# Altium PCB projector_board.PcbDoc
Units mil, origin at the board's own origin, x right, y up, seen from the top; angles counter-clockwise.
Board outline 2125 x 2250 mil, 2 copper layers (Top Layer, Bottom Layer); 47 components, 33 nets, 148 pads, 36 vias.
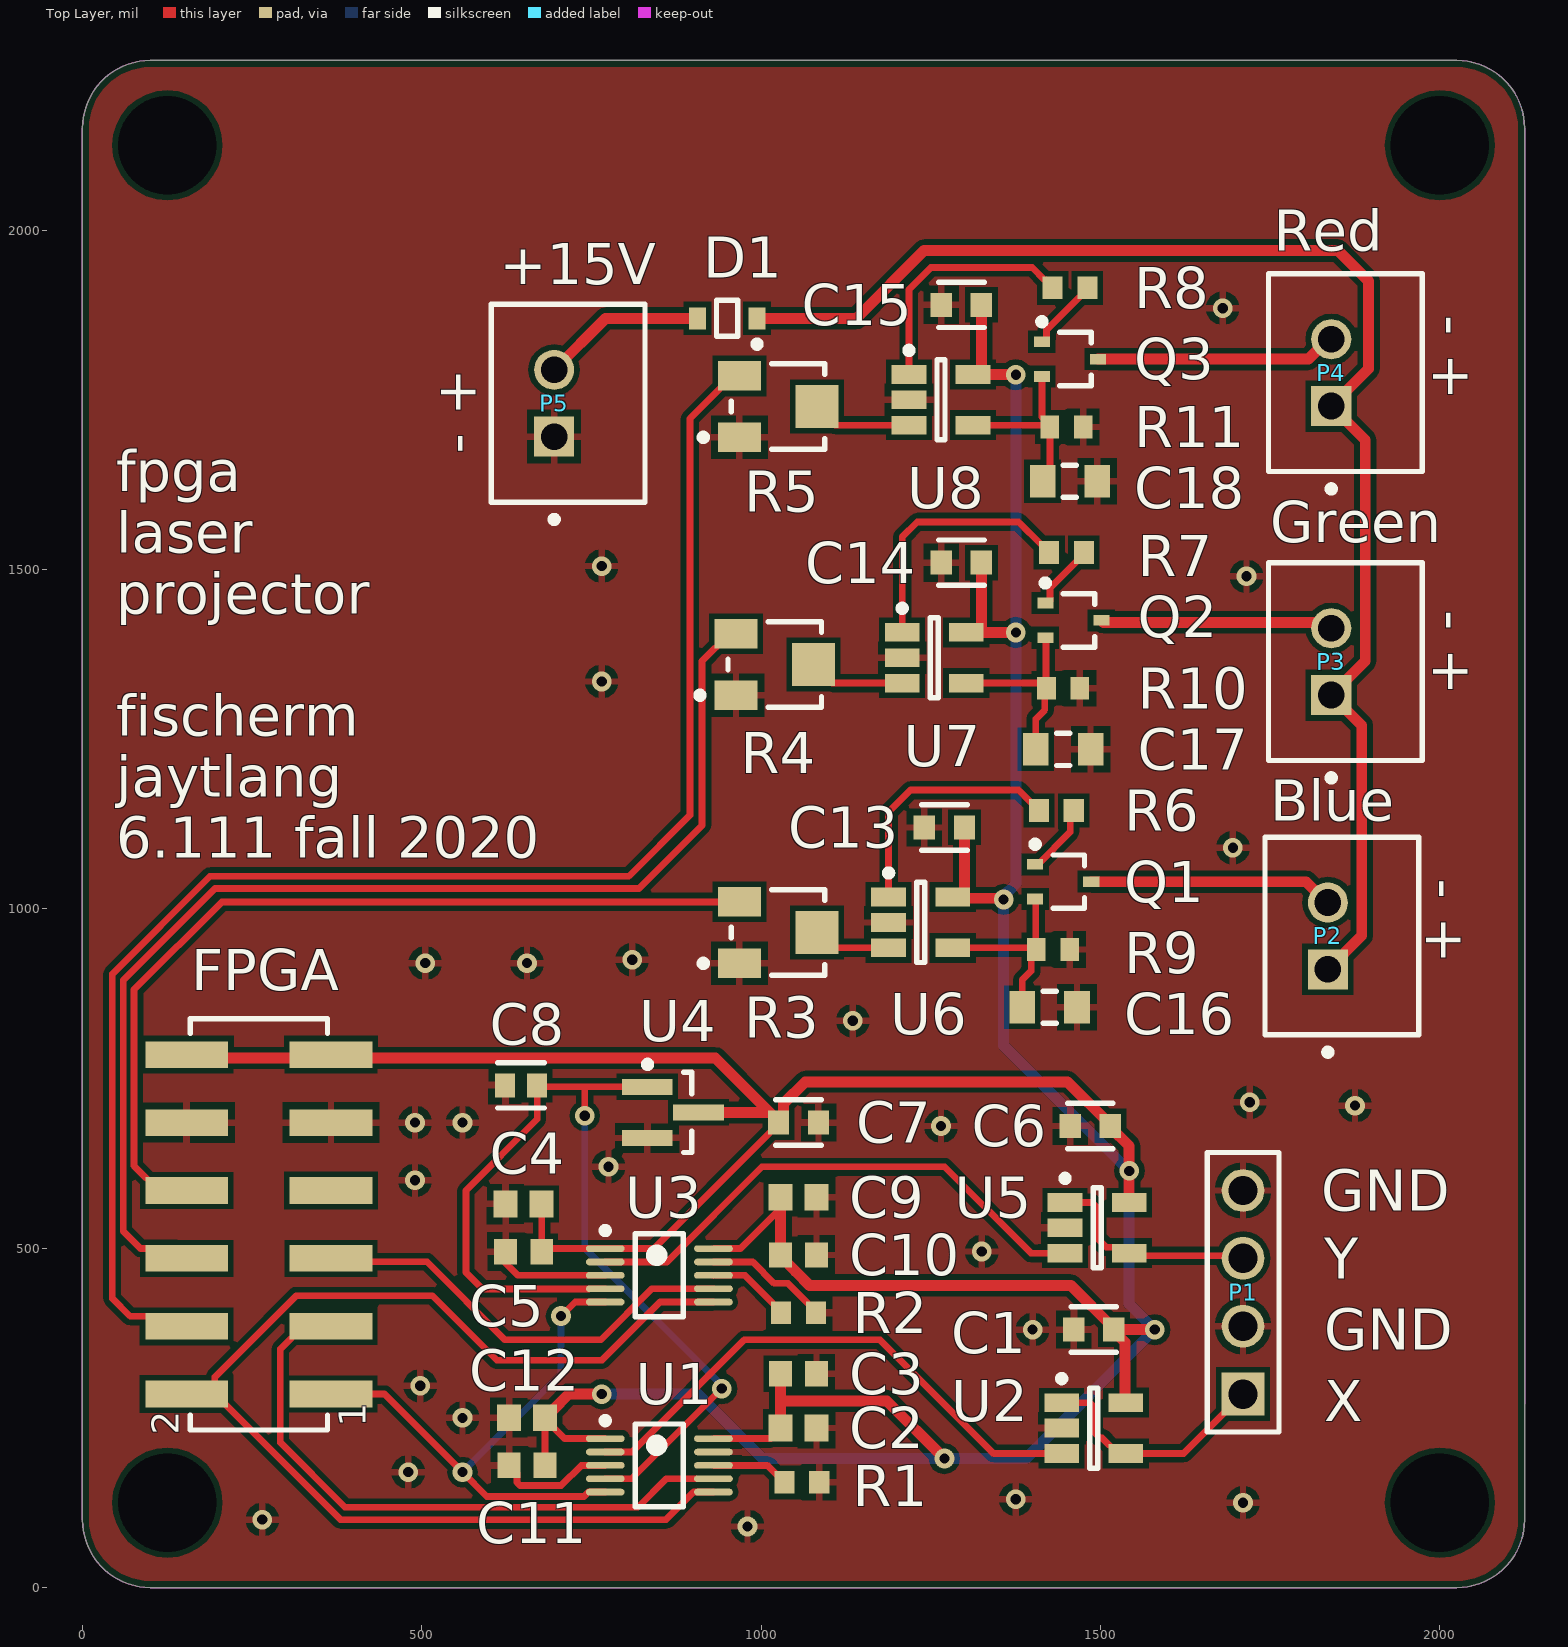
[diagram p0: Top Layer view]
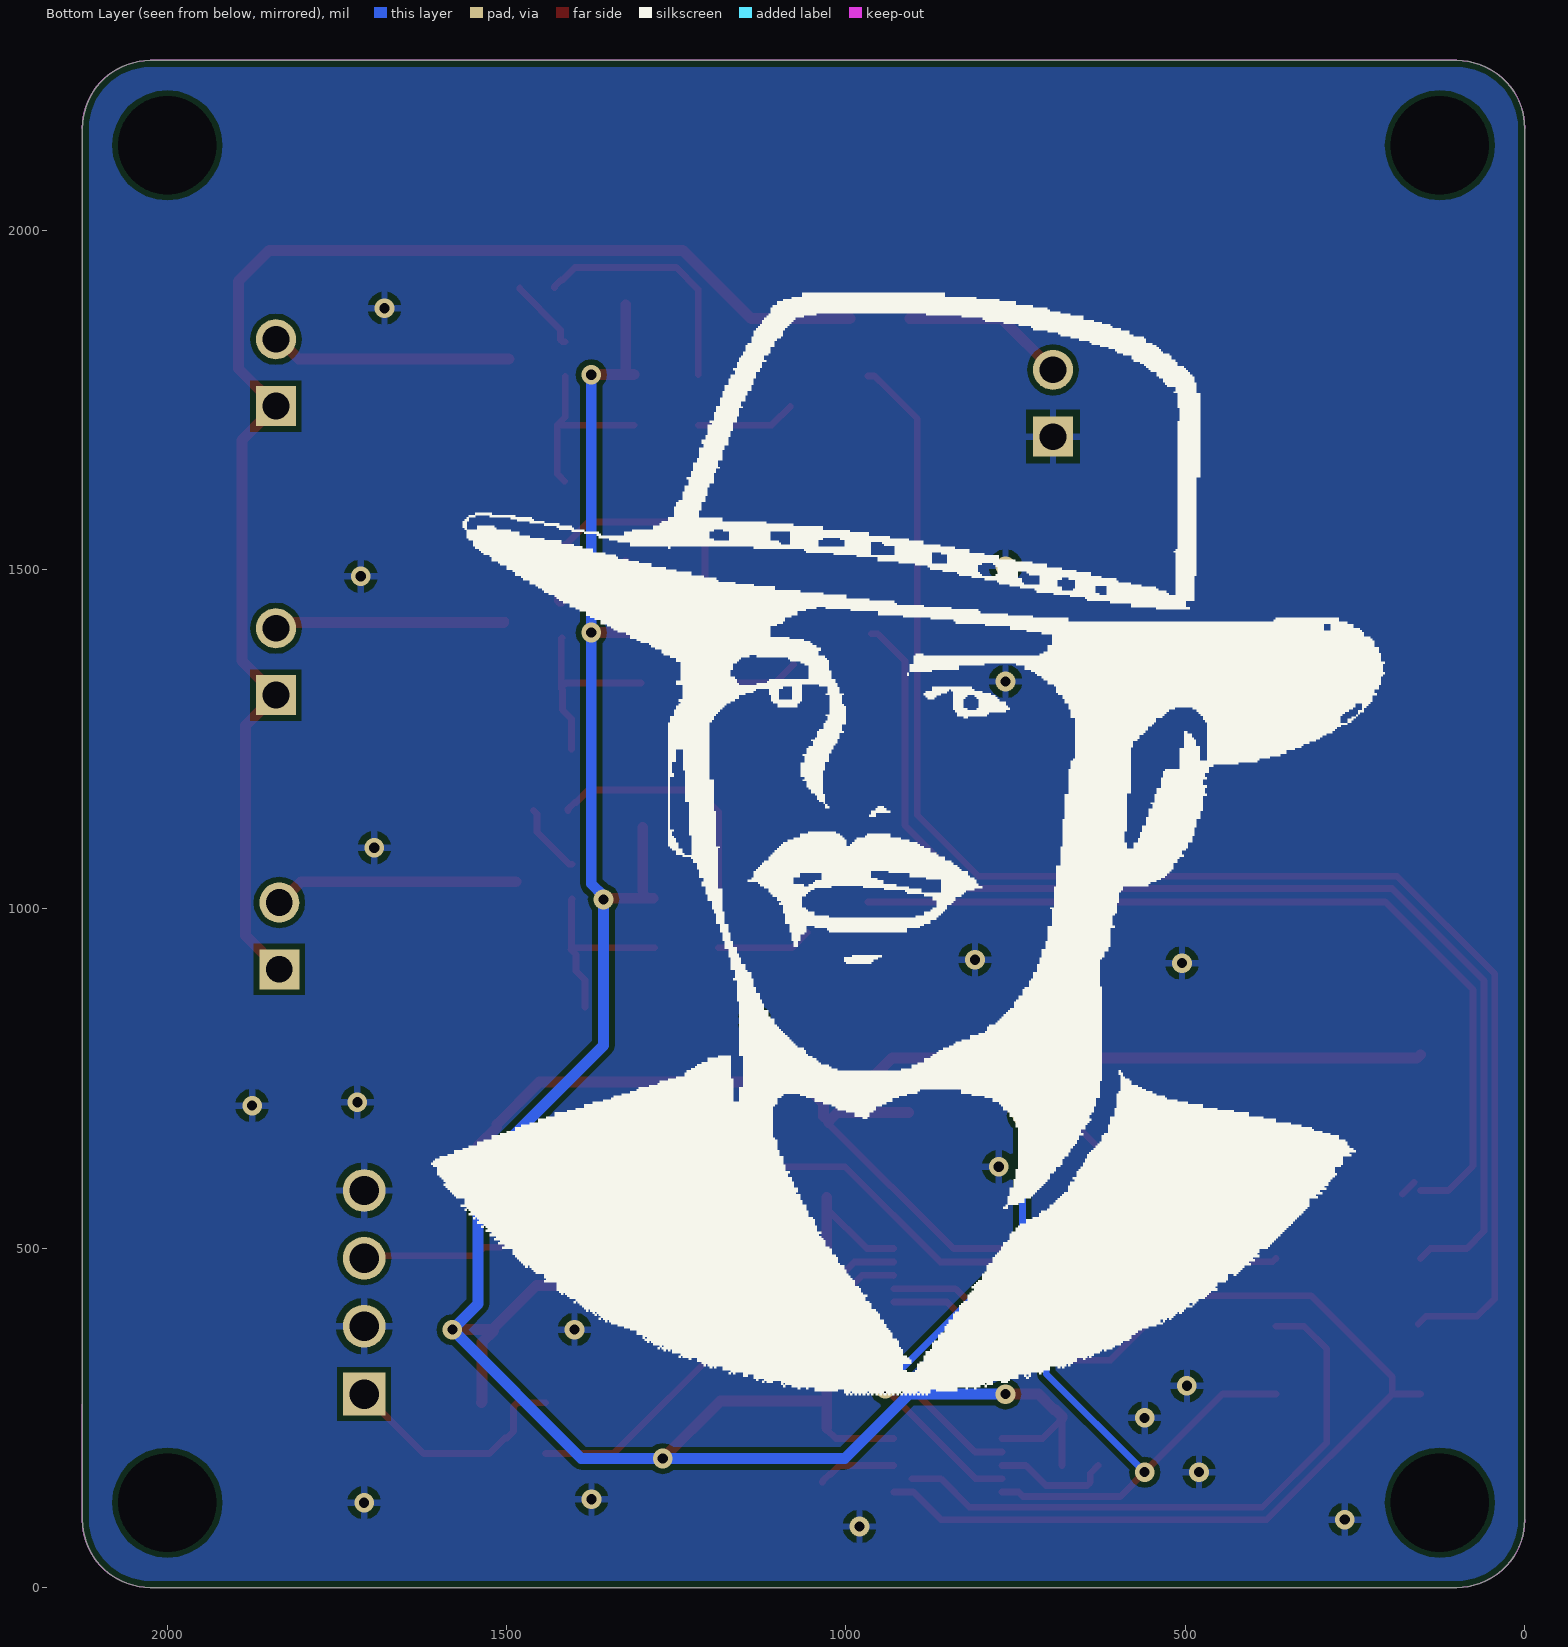
[diagram p1: Bottom Layer view, seen from below]
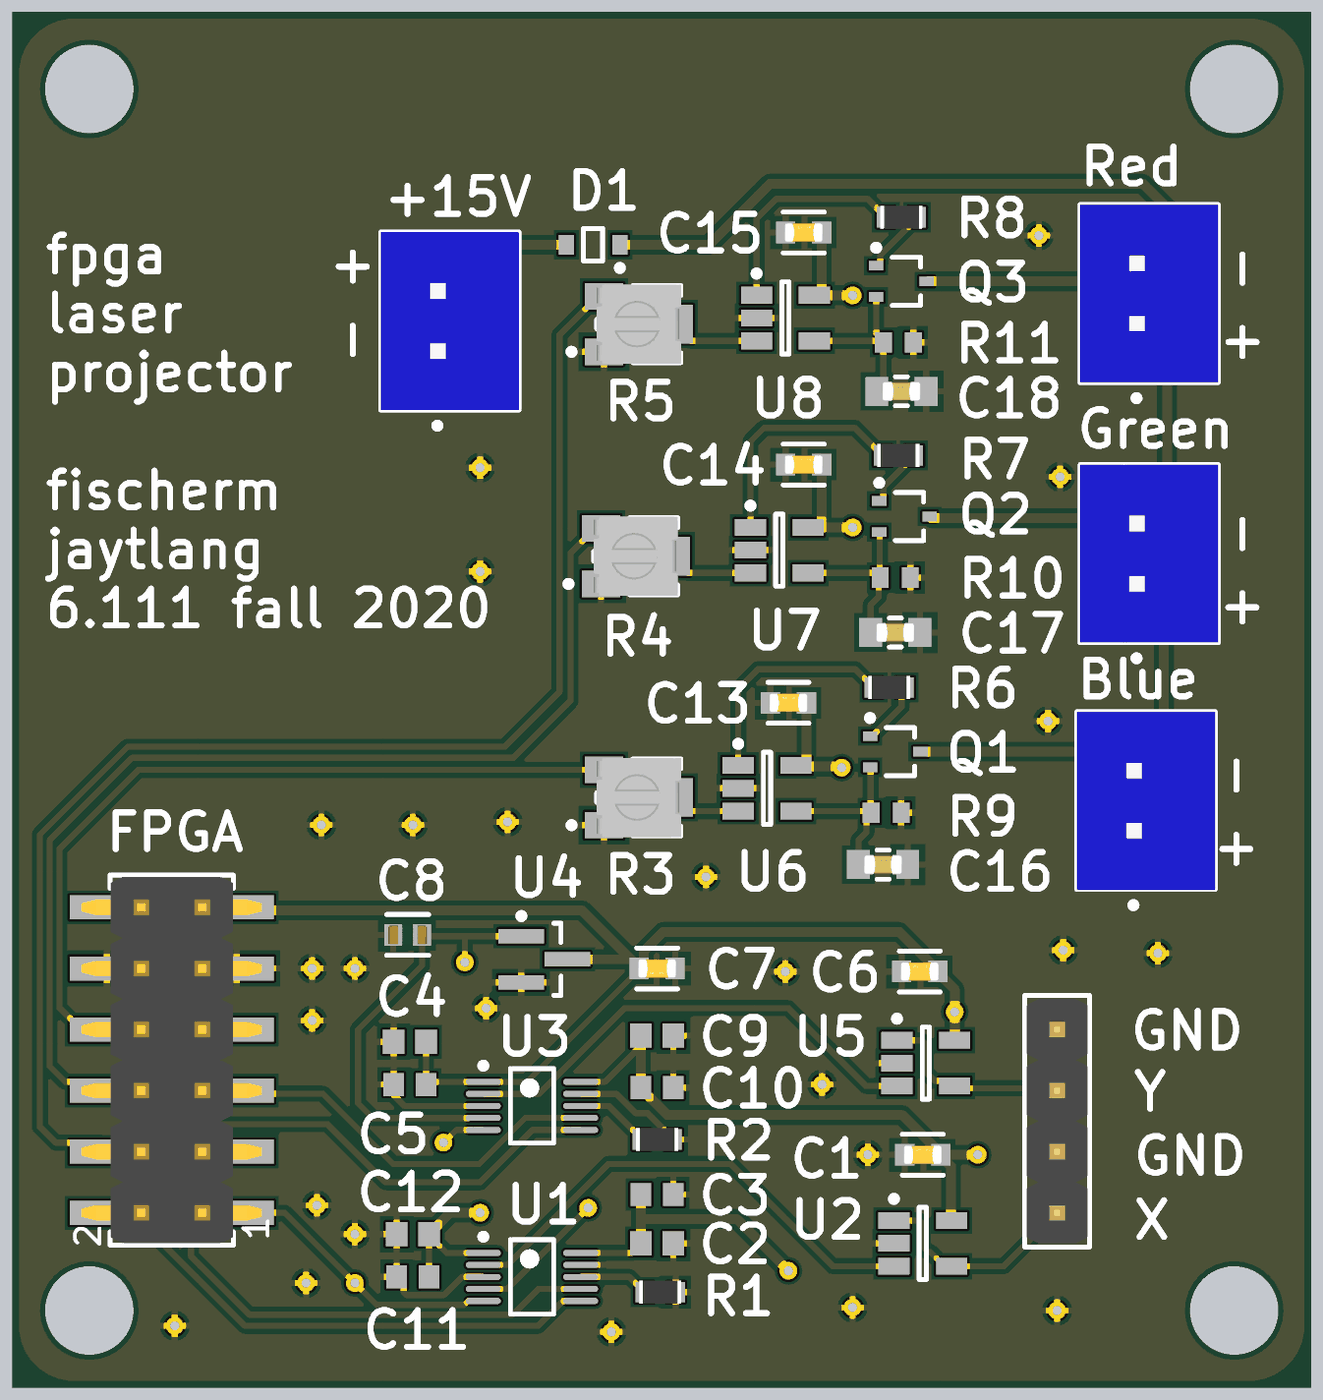
[diagram p2: 3D render of the assembled board from above, using the file's embedded part models]

## Layer stack, top to bottom
Top Solder: solder mask 0.4, Solder Resist, Dk 3.5
Top Layer: signal copper 1.4
Dielectric 1: dielectric 12.6, FR-4, Dk 4.8
Bottom Layer: signal copper 1.4
Bottom Solder: solder mask 0.4, Solder Resist, Dk 3.5

## Board outline
0,100 ccw(c100,100) 100,0 2025,0 ccw(c2025,100) 2125,100 2125,270 2125,2050 2125,2150 ccw(c2025,2150) 2025,2250 1785,2250 275,2250 100,2250 ccw(c100,2150) 0,2150

## Design rules (kind name [scope] priority, off if disabled: settings)
BoardOutlineClearance [All] p1: gap=10 ignorepadtopadclearanceinfootprint=FALSE
Clearance [All] p1: gap=8 ignorepadtopadclearanceinfootprint=FALSE except(0: Arc-Hole Track-Hole SMDPad-Hole THPad-Hole Via-Hole Fill-Hole Poly-Hole Region-Hole Text-Hole; 6: Arc-Arc Arc-Track Arc-SMDPad Track-Track Track-SMDPad SMDPad-SMDPad)
HoleSize [All] p1: absolutevalues=TRUE maxlimit=1000 minlimit=12 maxpercent=80.000 minpercent=20.000
MinimumAnnularRing [All] p1: minimumring=6
MinimumSolderMaskSliver [All] p1 off: minsoldermaskwidth=10
PolygonConnect [All] p1: connectstyle=Relief reliefconductorwidth=10 reliefentries=4 polygonreliefangle="90 Angle" airgapwidth=10
RoutingVias [All] p1: holewidth=15 width=29 viastyle="Through Hole" minholewidth=15 minwidth=29 maxholewidth=1000 maxwidth=2000
SilkToSolderMaskClearance [IsPad] p1 off: minsilkscreentomaskgap=10 clearancetoexposedcopper=TRUE
SolderMaskExpansion SolderMaskExpansion_1 [IsVia] p1: expansion=0 istentingtop=FALSE soldermaskfromhole=TRUE
SolderMaskExpansion [All] p2: expansion=4 istentingtop=FALSE
Width [All] p1: maxlimit=1000 minlimit=8 preferedwidth=16 minimp=50.000000 maximp=50.000000 favimp=50.000000
27 further rules are at their usual default settings.

## Classes and differential pairs
component class galvo_driver: C1 C2 C3 C4 C5 C6 C7 C8 C9 C10 C11 C12 C13 C14 C15 C16 C17 C18 D1 P1 P2 P3 P4 Q1 Q2 Q3 R1 R2 R3 R4 R5 R6 R7 R8 R9 R10 R11 U1 U2 U4 U5 U6 U7 U8

## Components (designator, comment, footprint, x,y, rotation, side; value= is the part's Value field where it differs from the comment)
C1 "1uF" FP-CC0603-DA-MFG 1490,380 r180 top value="1 uF"
C2 "0.1uF" CAPC1608X87X35NL15T15 1055,235 r0 top
C3 "10uF" CAPC1608X90X35NL10T15 1055,315 r180 top
C4 "0.1uF" CAPC1608X87X35NL15T15 650,565 r180 top
C5 "10uF" CAPC1608X90X35NL10T15 650,495 r0 top
C6 "1uF" FP-CC0603-DA-MFG 1485,680 r180 top value="1 uF"
C7 "1uF" FP-CC0603-DA-MFG 1055,685 r0 top value="1 uF"
C8 "4.7uF" FP-C0603-CG-MFG 646.38,740 r180 top
C9 "0.1uF" CAPC1608X87X35NL15T15 1055,575 r0 top
C10 "10uF" CAPC1608X90X35NL10T15 1055,490 r180 top
C11 "0.1uF" CAPC1608X87X35NL15T15 655,250 r180 top
C12 "10uF" CAPC1608X90X35NL10T15 655,180 r0 top
C13 "1uF" FP-CC0603-DA-MFG 1270,1120 r180 top value="1 uF"
C14 "1uF" FP-CC0603-DA-MFG 1295,1510 r180 top value="1 uF"
C15 "1uF" FP-CC0603-DA-MFG 1295,1890 r180 top value="1 uF"
C16 "10nF" FP-CGA3E-0_3-0_1-IPC_A 1425,855 r0 top
C17 "10nF" FP-CGA3E-0_3-0_1-IPC_A 1445,1235 r0 top
C18 "10nF" FP-CGA3E-0_3-0_1-IPC_A 1455,1630 r0 top
D1 "BAT54HT1G" ONSC-SOD-323-2-477-02_V 950,1870 r180 top
FPGA "61001221121" 61001221121 260,535 r90 top (schematic designator J1)
P1 "61300411121" 61300411121 1710,435 r90 top
P2 "Blue" JST-B2B-XH-A_V 1835,960 r90 top
P3 "Green" JST-B2B-XH-A_V 1840,1364.21 r90 top
P4 "Red" JST-B2B-XH-A_V 1840,1790 r90 top
P5 "+15V" JST-B2B-XH-A_V 695,1745 r90 top
Q1 "50C02MH-TL-E" ONSC-MCPH-3_V 1445,1040 r0 top
Q2 "50C02MH-TL-E" ONSC-MCPH-3_V 1460,1425 r0 top
Q3 "50C02MH-TL-E" ONSC-MCPH-3_V 1455,1810 r0 top
R1 "10K" RESC1609X55X30LL15T15 1060,155 r0 top
R2 "10K" RESC1609X55X30LL15T15 1055,405 r0 top
R3 "10K" BOUR-3313J-1_V 1025,965 r0 top
R4 "10K" BOUR-3313J-1_V 1020,1360 r0 top
R5 "10K" BOUR-3313J-1_V 1025,1740 r0 top
R6 "10K" RESC1609X55X30LL15T15 1435,1145 r0 top
R7 "10K" RESC1609X55X30LL15T15 1450,1525 r0 top
R8 "10K" RESC1609X55X30LL15T15 1455,1915 r0 top
R9 "127R" RESC1608X55X30LL15T15 1430,940 r180 top
R10 "127R" RESC1608X55X30LL15T15 1445,1325 r180 top
R11 "127R" RESC1608X55X30LL15T15 1450,1710 r180 top
U1 "AD5541ABRMZ" RM-10_L 850,180 r0 top
U2 "AD8605ARTZ-REEL7" ADI-RJ-5_M 1490,235 r0 top
U3 "AD5541ABRMZ" RM-10_L 850,460 r0 top
U4 "AD1582BRTZ-REEL7" ADI-RT-3_M 870,700 r0 top
U5 "AD8605ARTZ-REEL7" ADI-RJ-5_M 1495,530 r0 top
U6 "AD8605ARTZ-REEL7" ADI-RJ-5_M 1235,980 r0 top
U7 "AD8605ARTZ-REEL7" ADI-RJ-5_M 1255,1370 r0 top
U8 "AD8605ARTZ-REEL7" ADI-RJ-5_M 1265,1750 r0 top

## Footprints (in the part's own frame and the unit in brackets; to place one, negate y for a bottom-side part, rotate by r counter-clockwise, add the part's x,y. Pads: shape width x height; smd on the part's side, far side on the other; paste and mask are expansions set on the pad)
61001221121 [mm] "Pin Header, pitch 2.54 mm, SMD, Vertical, dual row, 12p"
  rect 1x3.1 smd: 1(-6.35,-2.7) 2(-6.35,2.7) 3(-3.81,-2.7) 4(-3.81,2.7) 5(-1.27,-2.7) 6(-1.27,2.7) 7(1.27,-2.7) 8(1.27,2.7) 9(3.81,-2.7) 10(3.81,2.7) 11(6.35,-2.7) 12(6.35,2.7)
  silkscreen extent -7.69,-2.56 7.69,2.56, body extent -7.62,-3.75 7.62,3.75, height 9.62
61300411121 [mm] "Pin Header, pitch 2.54 mm, THT, Vertical, single row, 4p"
  rect 1.6x1.6 hole 1.1: 1(-3.81,0)
  round 1.6 hole 1.1: 2(-1.27,0) 3(1.27,0) 4(3.81,0)
  silkscreen extent -5.23,-1.34 5.23,1.34, body extent -5.08,-1.27 5.08,1.27, height 8.57
ADI-RJ-5_M [mm] "SOT-23, 5-Leads, Body 2.9x1.6mm, Pitch 0.95mm, IPC Low Density"
  rect 1.3x0.7 smd: 1(-1.2,0.95) 2(-1.2,0) 3(-1.2,-0.95) 4(1.2,-0.95) 5(1.2,0.95)
  silkscreen extent -1.32,-1.5 0.15,1.97, body extent -0.85,-1.5 0.85,1.5, height 1.45
ADI-RT-3_M [mm] "SOT23, 3-Leads, Body 2.9x1.3mm, Pitch 0.96mm, IPC Low Density"
  rect 1.9x0.6 smd: 1(-0.96,0.96) 2(-0.96,-0.96) 3(0.96,0)
  silkscreen extent -1.07,-1.5 0.7,1.92, body extent -0.7,-1.52 0.7,1.52, height 1.12
BOUR-3313J-1_V [mm] "SMD, 3-Leads, Body 3.5x3.2mm, Pitch 1.15mm"
  rect 1.6x1.1 smd paste+0: 1(-1.45,-1.15) 3(-1.45,1.15)
  rect 1.6x1.6 smd paste+0: 2(1.45,0)
  silkscreen extent -2.92,-1.6 1.75,1.6, body extent -1.75,-1.65 1.75,1.65, height 2.11
CAPC1608X87X35NL15T15 [mm] "Chip Capacitor, 2-Leads, Body 1.60x0.80mm, IPC Medium Density"
  rect 0.9x1 smd: 1(-0.675,0) 2(0.675,0)
  body extent -0.87,-0.48 0.87,0.47, height 0.87
CAPC1608X90X35NL10T15 [mm] "Chip Capacitor, 2-Leads, Body 1.60x0.80mm, IPC Medium Density"
  rect 0.85x0.95 smd: 1(-0.675,0) 2(0.675,0)
  body extent -0.85,-0.45 0.85,0.45, height 0.9
FP-C0603-CG-MFG [mm]
  rect 0.75x0.9 smd paste+0 mask+0: 1(-0.6,0) 2(0.6,0)
  silkscreen extent -0.87,-0.85 0.87,0.85, body extent -1.2,-0.6 1.2,0.6, height 0.25
FP-CC0603-DA-MFG [mm]
  rect 0.8x0.9 smd paste+0 mask+0: 1(-0.75,0) 2(0.75,0)
  silkscreen extent -0.85,-0.85 0.85,0.85, body extent -1.35,-0.75 1.35,0.75, height 0.25
FP-CGA3E-0_3-0_1-IPC_A [mm]
  rect 0.956x1.206 smd paste+0 mask+0: 1(-1.025,0) 2(1.025,0)
  silkscreen extent -0.25,-0.6 0.25,0.6, body extent -2,-1.1 2,1.1, height 0.25
JST-B2B-XH-A_V [mm] "Header, 2-Leads, Body 7.4x5.75mm, Pitch 2.5mm"
  rect 1.5x1.5 hole 1: 1(-1.25,0)
  round 1.5 hole 1: 2(1.25,0)
  silkscreen extent -4.47,-3.4 3.7,2.35, body extent -3.7,-3.4 3.7,2.35, height 7
ONSC-MCPH-3_V [mm] "SOT23, 3-Leads, Body 2x1.6mm, Pitch 0.65mm"
  rect 0.6x0.4 smd: 1(-1.05,0.65) 2(-1.05,-0.65) 3(1.05,0)
  silkscreen extent -1.17,-1 0.8,1.52, body extent -0.8,-1 0.8,1, height 0.9
ONSC-SOD-323-2-477-02_V [mm] "SOD, 2-Leads, Body 1.7x1.25mm"
  rect 0.63x0.83 smd: 1(-1.115,0) 2(1.115,0)
  silkscreen extent -1.24,-0.67 0.4,1.09, body extent -0.85,-0.63 0.85,0.63, height 1.06
RESC1608X55X30LL15T15 [mm] "Chip Resistor, 2-Leads, Body 1.60x0.80mm, IPC High Density"
  rect 0.7x0.85 smd: 1(-0.625,0) 2(0.625,0)
  body extent -0.87,-0.48 0.87,0.48, height 0.55
RESC1609X55X30LL15T15 [mm] "Chip Resistor, 2-Leads, Body 1.75x0.95mm, IPC High Density"
  rect 0.75x0.85 smd: 1(-0.65,0) 2(0.65,0)
  body extent -0.87,-0.48 0.87,0.48, height 0.55
RM-10_L [mm] "TSSOP, 10-Leads, Body 3x3mm, Pitch 0.5mm, IPC High Density"
  oval 1.45x0.25 smd: 1(-2.025,1) 2(-2.025,0.5) 3(-2.025,0) 4(-2.025,-0.5) 5(-2.025,-1) 6(2.025,-1) 7(2.025,-0.5) 8(2.025,0) 9(2.025,0.5) 10(2.025,1)
  silkscreen extent -2.15,-1.55 0.9,1.8, body extent -1.55,-1.55 1.55,1.55, height 1.1

## Part data
C1 C6 C7 C13 C14 C15: library part CMP-03422-000924-1, "CAP CER 1UF 16V X7R 0603", Capacitance="1 uF", Manufacturer=YAGEO, Manufacturer Part Number=CC0603KRX7R7BB105, Package=CC0603-DA, Temperature="-55°C to +125°C", Temperature Characteristic=X7R, Temperature Coefficient=15%, Temperature Range High=+125°C, Temperature Range Low=-55°C, Tolerance=0.1, Voltage="16 V", Automotive=No, Category=Cap, ComponentLink2Description=Datasheet, ComponentLink2URL=http://www.yageo.com/documents/recent/UPY-GPHC_X7R_6.3V-to-50V_18.pdf, Device Class L1="Passive Components", Device Class L2=Capacitors, Device Class L3="Ceramic Capacitors", Digikey Description="CAP CER 1UF 16V X7R 0603", Footprint Url=http://www.yageo.com/exep/pages/download/literatures/UPY-C_GEN_24.pdf, Height=0.9mm, Lead Free=Yes, Material=Ceramic, Mouser Description="Multilayer Ceramic Capacitor, CC Series, 1 - F, - 10%, X7R, 16 V, 0603 [1608 Metric]", Octopart=https://octopart.com/cc0603krx7r7bb105-yageo-42271928, RoHS=TRUE, Voltage Rating="16 V"
C2 C4 C9 C11: library part CMP-2006-03300-1, "C0603X104K5RACTU", Manufacturer=Kemet, Part Number=C0603X104K5RACTU
C3 C5 C10 C12: library part CMP-2006-02792-1, "GRM188R60J106ME47D", Manufacturer=Murata, Part Number=GRM188R60J106ME47D
C8: library part CMP-03020-024641-1, "CAP CER 4.7UF 6.3V X5R 0603", Manufacturer=Kemet, Manufacturer Part Number=C0603C475K9PACTU, Package=C0603-CG, Temperature="-55°C to +85°C", Temperature Characteristic=X5R, Temperature Coefficient=15%, Temperature Range High=+85°C, Temperature Range Low=-55°C, Tolerance=10%, Voltage Rating=6.3V, Automotive=No, Capacitance=4.7uF, Category=Cap, ComponentLink2Description=Datasheet, ComponentLink2URL=https://content.kemet.com/datasheets/KEM_C1006_X5R_SMD.pdf, Device Class L1="Passive Components", Device Class L2=Capacitors, Device Class L3="Ceramic Capacitors", Digikey Description="CAP CER 4.7UF 6.3V X5R 0603", Height=0.9mm, Ipc Land Pattern Name=CAPC16080X80, Lead Free=Yes, Material=Ceramic, Mouser Description="Multilayer Ceramic Capacitors MLCC - SMD/SMT 6.3volts 4.7uF X5R 10%", Octopart=https://octopart.com/c0603c475k9pactu-kemet-104242, RoHS=TRUE
C16 C17 C18: library part CMP-08246-000769-1, "Cap Ceramic 10nF 100V X8R 10% Pad SMD 0603 +150°C Automotive T/R", Case Code (Imperial)=0603, Case Code (Metric)=1608, Dielectric=X8R, Max Operating Temperature=150°C, Min Operating Temperature=-55°C, Package Quantity=4000, Ratings=AEC-Q200, Tolerance=10%, Voltage Rating=100V, Capacitance=10nF, Case/Package=0603, Composition=Ceramic, Depth=0.8mm, Height=0.8mm, Length=1.6mm, Mount="Surface Mount", Packaging="Tape and Reel", Termination=SMD/SMT, Thickness=0.035inch, Voltage Rating (DC)=100V, Weight=7.1E-05oz, Width=0.031inch
D1: library part CMP-1055-00462-1, "Schottky Barrier Diode, 2-Pin SOD-323, Pb-Free, Tape and Reel", Manufacturer="On Semiconductor", ComponentLink1Description="Manufacturer URL", ComponentLink1URL=http://www.onsemi.com/, ComponentLink2Description=Datasheet, ComponentLink2URL=http://www.onsemi.cn/pub_link/Collateral/BAT54HT1-D.PDF, ComponentLink3Description="Package Specification", ComponentLink3URL=http://www.onsemi.com/pub_link/Collateral/477-02.PDF.1, Configuration=Single, DatasheetVersion="Rev. 6", IFSM Max (A)=0.6, Mounting Technology="Surface Mount", PackageDescription="2-Pin SOD, Body 1.7 x 1.25 mm", PackageReference=SOD-323-2-477-02, PackageVersion="Rev. H, 03/2007", Packing="Tape and Reel", PartNumber=BAT54HT1G, RoHS=TRUE, trr Max (ns)=5
FPGA: library part CMP-1502-01029-1, "SMT Vertical Pin Header WR-PHD, Pitch 2.54 mm, Dual Row, 12 pins", Contact Resistance=20mOhm, Manufacturer="Wurth Elektronik", Operating Temperature=-40to125degC, Rated Current=3A, Withstanding Voltage=500VAC, Working Voltage=250VAC, Datasheet URL=https://katalog.we-online.de/em/datasheet/6100xx21121.pdf, Gender=Male, Manufacturer URL=http://www.we-online.de, Mounting Technology=SMT, Orientation=Vertical, Package Reference=61001221121, Packaging=Tube, Part Number=61001221121, Pin Number=12, Pitch=2.54mm, Publisher=WurthElektronik, Row Number=Dual
P1: library part CMP-1502-01064-1, "THT Vertical Pin Header WR-PHD, Pitch 2.54 mm, Single Row, 4 pins", Contact Resistance=20mOhm, Manufacturer="Wurth Elektronik", Operating Temperature=-40to105degC, Rated Current=3A, Withstanding Voltage=500VAC, Working Voltage=250VAC, Datasheet URL=https://katalog.we-online.de/em/datasheet/6130xx11121.pdf, Gender=Male, Manufacturer URL=http://www.we-online.de, Mounting Technology=THT, Orientation=Vertical, Package Reference=61300411121, Packaging=Bag, Part Number=61300411121, Pin Number=4, Pitch=2.54mm, Publisher=WurthElektronik, Row Number=Single
P2 P3 P4 P5: library part CMP-2000-05888-1, "Male Header, Pitch 2.5 mm, 1 x 2 Position, Height 7 mm, Tail Length 3.4 mm, -25 to 85 degC, RoHS, Bulk", Manufacturer=JST, Package Description="Male Header, Pitch 2.5 mm, 1 x 2 Position, Height 7 mm, Tail Length 3.4 mm", Package Reference=B2B-XH-A, Datasheet URL=http://www.jst-mfg.com/product/pdf/eng/eXH.pdf, Datasheet Version=05/2016, Manufacturer URL=http://www.jst.com/home2.html, Mounting Technology=ThroughHole, No of Positions=2, Pitch=2.5mm, Style/Orientation=StraightHeader/Plug, Termination=Crimp, Type=ShroudedHeader
Q1 Q2 Q3: library part CMP-1048-00258-1, "Bipolar Transistor, 50 V, 0.5 A, Low VCE(sat), NPN Single, 3-Pin MCPH, Pb-Free, Tape and Reel", Manufacturer="On Semiconductor", ComponentLink1Description="Manufacturer URL", ComponentLink1URL=http://www.onsemi.com/, ComponentLink2Description=Datasheet, ComponentLink2URL=http://www.onsemi.com/pub_link/Collateral/50C02MH-D.PDF, ComponentLink3Description="Package Specification", ComponentLink3URL=http://www.onsemi.com/pub_link/Collateral/EN7354-D.PDF, IC Continuous (A)=0.5, Mounting Technology="Surface Mount", PackageDescription="3-Pin Small Outline Transistor, Body 2 x 1.6 mm, Pitch 0.65 mm", PackageReference=MCPH-3, Packing="Tape and Reel", PartNumber=50C02MH-TL-E, Polarity=NPN, RoHS=TRUE
R1 R2 R6 R7 R8: library part CMP-2000-07452-1, "Chip Resistor, 10 KOhm, +/- 1%, 0.1 W, -55 to 155 degC, 0603 (1608 Metric), RoHS, Tape and Reel", Case Code (Imperial)=0603, Case Code (Metric)=1608, Manufacturer=Panasonic, Max Operating Temperature=155degC, Max Power Dissipation=100mW, Min Operating Temperature=-55degC, Package Description="2-Pin Surface Mount Device, Body 1.6 x 0.85 mm", Package Quantity=1, Package Reference=603, Resistance=10KOhm, Temperature Coefficient=100ppm\/degreesC, Tolerance=1%, Voltage Rating=75V, Case\/Package=0603, Composition=ThickFilm, Contact Plating=Tin, Datasheet URL=https://industrial.panasonic.com/cdbs/www-data/pdf/RDA0000/AOA0000C304.pdf, Datasheet Version=02/2017, Depth=0.8mm, Height=0.45mm, Lead Free=LeadFree, Length=1.6mm, Manufacturer URL=http://www.panasonic.com/, Military Standard=Not, Mount=SurfaceMount, Mounting Technology=SurfaceMount, Number of Pins=2, Number of Terminations=2, Packaging=TapeandReel, Power Rating=100mW, Radiation Hardening=No, REACH SVHC=NoSVHC, RoHSCompliant=true, Termination=SMD/SMT, Voltage Rating (DC)=75V, Width=0.031inch
R3 R4 R5: library part CMP-2000-05585-1, "Trimming Potentiometer, 10 KOhm, -55 to 125 degC, 3-Pin SMD, RoHS, Tape and Reel", Manufacturer=Bourns, Package Description="3-Pin Surface Mount Device, Body 3.5 x 3.2 mm, Pitch 1.15 mm", Package Reference=3313J-1, Power Rating=125mW, Resistance Tolerance=±20%, Temperature Coefficient=±100ppm/°C, Track Resistance=10kohm, Datasheet URL=http://www.bourns.com/docs/Product-Datasheets/3313.pdf, Datasheet Version=05/2016, Manufacturer URL=http://www.bourns.com/, Mounting Technology=SurfaceMount, No. of Turns=1, Potentiometer Mounting=SMD, RoHS Compliant=Yes, SVHC=NoSVHC(16-Jun-2014)
R9 R10 R11: library part CMP-2000-00226-1, "ERJ-3EKF1270V", Manufacturer=Panasonic, Part Number=ERJ-3EKF1270V
U1 U3: library part CMP-0318-02105-2, "Single 16-Bit Voltage Output Digital-to-Analog Converter with Serial Interface, 2.7 to 5.5 V, -40 to +125 degC, RM-10, Pb-Free, Tube", Generic Part Number=AD5541A, Manufacturer="Analog Devices", # DAC Outputs=1, ComponentLink1Description="Manufacturer URL", ComponentLink1URL=http://www.analog.com/en/index.html, ComponentLink2Description=Datasheet, ComponentLink2URL=http://www.analog.com/static/imported-files/data_sheets/AD5541A.pdf, ComponentLink3Description="Package Specification", ComponentLink3URL=http://www.analog.com/static/imported-files/packages/PKG_PDF/MSOP%28RM%29/RM_10.pdf, ComponentLink4Description="Product URL", ComponentLink4URL=http://www.analog.com/en/digital-to-analog-converters/da-converters/ad5541a/products/product.html, DatasheetVersion=Rev.A, Max V+=5.5V, Mounting Technology="Surface Mount", Op Pwr Diss=600ÂµW, PackageDescription="10-Lead Mini Small Outline Package [MSOP]", PackageReference=RM-10, PackageVersion=May-2005, Packing=Tube, PartNumber=AD5541ABRMZ, Resolution (Bits)=16, RevisionNote="Component URL fixed", RoHS=Y, Settling Time=1Âµs, Single Supply=Yes
U2 U5 U6 U7 U8: library part CMP-0384-01494-2, "Single Channel Wide Bandwidth Operational Amplifier, 10 MHz BW, 5 V/us SR, Industrial, 5-pin SOT23 (RJ-5), Reel", Amplifiers Per Package=1, Generic Part Number=AD8605, Input Bias Current=200fA, Input Offset Voltage=20uV, Manufacturer="Analog Devices", Code_JEDEC=MO-178-AA, ComponentLink1Description="Manufacturer URL", ComponentLink1URL=http://www.analog.com/en/index.html, ComponentLink2Description=Datasheet, ComponentLink2URL=http://www.analog.com/static/imported-files/data_sheets/AD8605_8606_8608.pdf, ComponentLink3Description="Package Specification", ComponentLink3URL=http://www.analog.com/static/imported-files/packages/PKG_PDF/SOT-23(RJ)/RJ_5.pdf, ComponentLink4Description="Reference Circuit", ComponentLink4URL=http://www.analog.com/en/all-operational-amplifiers-op-amps/operational-amplifiers-op-amps/ad8605/products/product.html#product-recommendations, DatasheetVersion="Rev. L", Iq/Amp=1.2mA, Mounting Technology="Surface Mount", PackageDescription="5-Pin Small Outline Transistor Package, Body 2.9 x 1.6 mm, Pitch 0.95 mm", PackageReference=RJ-5, PackageVersion=121608-A, PartNumber=AD8605ARTZ-REEL7, RevisionNote="Reference Circuit URL fixed", Slew Rate=5V/us, Small Signal Bandwidth=10MHz, V Span Max=6V, V Span Min=2.7V
U4: library part CMP-0784-00464-1, "Micropower, Precision Series Mode Voltage Reference, 2.5 V Output, 2.7 to 12 V Supply, Industrial, 3-pin SOT23 (RT-3), Reel", Manufacturer="Analog Devices", Operating Temp Range="-40 to 125 degC", Code_JEDEC=TO-236-AB, ComponentLink1Description="Manufacturer URL", ComponentLink1URL=http://www.analog.com/en/index.html, ComponentLink2Description=Datasheet, ComponentLink2URL=http://www.analog.com/static/imported-files/data_sheets/AD1582_1583_1584_1585.pdf, ComponentLink3Description="Package Specification", ComponentLink3URL="http:/www.analog.com/static/imported-files/packages/PKG_PDF/SOT-23-3 (RT)/RT_3.pdf", ComponentLink4Description="URL Link1", ComponentLink4URL="Product URL:http://www.analog.com/en/special-linear-functions/voltage-references/ad1582/products/product.html", DatasheetVersion="Rev. I", Mounting Technology="Surface Mount", PackageDescription="3-Pin Small Outline Transistor Package, Body 2.9 x 1.3 mm, Pitch 0.96 mm", PackageReference=RT-3, PackageVersion="011909-C, 02/2009", Packing=Reel, PartNumber=AD1582BRTZ-REEL7, Ref Out TC (ppm/C)=18, Vout=2.5V

## Free pads (board coordinates)
  round 60 hole 145 unplated: 2(125,125) 2(125,2125) 2(2000,125) 2(2000,2125)

## Via types
v1: diameter 29, hole 15, Top Layer to Bottom Layer, 36 vias

## Nets (pads, with @x,y where several pads share a name; then routed paths per layer and width w, separated by ;. In a path a pad name is that pad's centre, name@x,y a point inside that pad or via, vN(x,y) a via of type N, cw(c..) or ccw(c..) an arc to the next point about the centre after c; other vN are vias at no path point)
+2.5VREF: C8.1 U1.4 U3.4 U4.1 | length 1452.9
  Top Layer w10: v1(740,695) 740,737.8 ; U1.4 770.35,160.39 809.29,160.39 v1(941.95,293.05) ; U3.4 746.81,440.32 746.5,440 589.17,440 565,464.17 565,585 670,690 C8.1 672.2,737.8 740,737.8 ; U4.1 740,737.8
  Bottom Layer w10: v1(740,695) 740,500 940,300 940,295 v1(941.95,293.05)
+3.3V: C1.1 C2.1 C3.2 C4.1 C5.2 C6.1 C7.1 C9.1 C10.2 C11.1 C12.2 C13.1 C14.1 C15.1 FPGA.11 FPGA.12 U1.1 U1.10 U2.5 U3.1 U3.10 U4.3 U5.5 U6.5 U7.5 U8.5 | length 6816
  Top Layer w10: C5.2 680.94,499.37 U3.1 841.81,499.37 1025.47,683.03 C7.1 ; C5.2@676.57,499.37 C4.1@676.57,555 ; C12.2 C11.1@681.57,248.03 ; C11.1 C11.1@681.57,248.03 ; U1.1 710.24,219.37 C11.1@681.57,248.03 ; U1.10 1014.76,219.37 1028.43,233.03 C2.1 ; U3.10 969.37,499.37 C9.1@1028.43,558.43 ; U6.5 1290.75,1017.4 U6.5@1299.53,1026.18 ; U7.5 1314.06,1407.4 U7.5@1324.53,1417.87 ; U8.5@1312.41,1787.24 U8.5 1315.75,1787.4 U8.5@1324.53,1796.18 ; v1@1355.47,1015.63 v1(1357.24,1013.86) ; v1@1375.11,1407.24 v1(1375.28,1407.07) ; v1@1375.11,1787.24 v1(1375.28,1787.07)
  Top Layer w16: FPGA.12 158.7,780 366.3,780 932.44,780 1011.46,700.98 C7.1@1025.47,686.97 ; C11.1 681.57,251.97 691.29,261.69 693.26,261.69 716.57,285 v1(765,285) ; U4.3 C7.1@1010.47,700 ; C7.1 C7.1@1025.47,686.97 ; C2.1 1028.43,275 ; C3.2 1028.43,275 ; C9.1 1028.43,558.43 1028.43,488.03 1050.84,465.62 1050.84,465.5 1071.34,445 1456.5,445 1519.53,381.97 C1.1 ; v1(1270,190) 1185,275 1028.43,275 ; U6.5@1284.02,1015.63 v1@1355.47,1015.63 ; U6.5@1299.53,1026.18 C13.1 ; U7.5@1302.41,1407.24 v1@1375.11,1407.24 ; U8.5@1312.41,1787.24 v1@1375.11,1787.24 ; U7.5@1324.53,1417.87 C14.1 ; U8.5@1324.53,1796.18 C15.1 ; U2.5 1536.13,273.51 1536.13,361.43 1519.53,378.03 C1.1 ; U5.5@1542.24,577.4 v1(1542.24,613.86) 1542.24,650.32 1514.53,678.03 C6.1 1514.53,681.97 1451.5,745 1065,745 1032.94,712.94 1032.94,694.44 C7.1@1025.47,686.97 ; v1(1580,380) C1.1
  Bottom Layer w10: v1(1357.24,1013.86) v1@1357.24,1019
  Bottom Layer w16: v1(765,285) 906.87,285 1001.87,190 v1(1270,190) 1390,190 v1(1580,380) 1542.24,417.76 v1(1542.24,613.86) 1357.24,798.86 v1(1357.24,1013.86) ; v1@1357.24,1019 1375.28,1037.03 v1(1375.28,1407.07) v1(1375.28,1787.07)
+15: D1.1 P2.1 P3.1 P4.1 | length 2078.9
  Top Layer w16: D1.1 1140,1870 1240,1970 1850,1970 1895,1925 1895,1795.79 P4.1 1890,1690.79 1890,1365 P3.1 1885,1270 1885,960.79 P2.1
B_PWM: FPGA.8 R3.3 | length 1321.9
  Top Layer w10: FPGA.8 112.36,585 76,621.36 76,881 205.28,1010.28 R3.3 ; FPGA.8@163,597 FPGA.8@180,580
CS: FPGA.1 U1.5 U3.5 | length 832.9
  Top Layer w10: FPGA.1 445,285 v1(560,170) 595.7,134.3 739.15,134.3 745.49,140.63 U1.5 ; v1(705,400) 705.46,400 726.09,420.63 U3.5
  Bottom Layer w10: v1(560,170) 705,315 v1(705,400)
G_PWM: FPGA.6 R4.3 | length 1736.2
  Top Layer w10: FPGA.6 139.01,499.69 85.31,499.69 60,525 60,894.54 195.46,1030 820,1030 913,1123 913,1365.2 953.07,1405.28 R4.3
GND: C1.2 C2.2 C3.1 C4.2 C5.1 C6.2 C7.2 C8.2 C9.2 C10.1 C11.2 C12.1 C13.2 C14.2 C15.2 C16.2 C17.2 C18.2 FPGA.9 FPGA.10 P1.2 P1.4 P5.1 R1.2 R2.2 R3.1 R4.1 R5.1 R9.1 R10.1 R11.1 U1.3 U1.9 U2.2 U3.3 U3.9 U4.2 U5.2 U6.2 U7.2 U8.2 | length 513.6
  Top Layer w10: C5.1@623.43,480 623.43,478.03 641.46,460 U3.3 ; C12.1 640.04,168.39 640.04,154.96 644.7,150.3 705.3,150.3 735,180 U1.3 ; U3.9 987.75,479.69 1019.23,448.21 1039.35,448.21 1080.59,406.97 R2.2
  other v1: 980,90 265,100 1710,125 1375,130 480,170 560,250 497.71,297.25 1400,380 1325,495 490,600 775,620 1265,680 490,685 560,685 1875,710 1720,715 1135,835 505,920 655,920 810,925 1695,1090 765,1335 1715,1490 765,1505 1680,1885
NetC16_1: C16.1 Q1.2 R9.2 U6.4 | length 291.7
  Top Layer w10: U6.4 1402.8,942.6 R9.2@1404.53,940.87 ; C16.1 1384.65,895.02 1397.89,908.27 1397.89,932.5 R9.2 R9.2@1404.53,940.87 ; Q1.2 1404.53,1013.54 R9.2@1404.53,940.87
NetC17_1: C17.1 Q2.2 R10.2 U7.4 | length 291
  Top Layer w10: U7.4 1412.8,1332.6 R10.2@1419.53,1325.87 ; C17.1 1404.65,1280.02 1417.89,1293.27 1417.89,1322.5 1419.53,1324.13 R10.2@1419.53,1325.87 ; Q2.2 1419.53,1398.54 R10.2@1419.53,1325.87
NetC18_1: C18.1 Q3.2 R11.2 U8.4 | length 277.9
  Top Layer w10: U8.4 1422.8,1712.6 R11.2 ; Q3.2 1413.66,1724.68 1425.39,1712.95 R11.2 ; C18.1 1425.39,1640.75 R11.2
NetD1_2: D1.2 P5.2 | length 242.5
  Top Layer w16: P5.2 770.79,1870 D1.2
NetP2_2: P2.2 Q1.3 | length 361.4
  Top Layer w10: P2.2@1833.6,1009.21 P2.2
  Top Layer w16: Q1.3 1802.82,1040 P2.2@1833.6,1009.21
NetP3_2: P3.2 Q2.3 | length 343.5
  Top Layer w10: Q2.3 Q2.3@1504.21,1422.13 ; P3.2@1831.3,1422.13 P3.2
  Top Layer w16: Q2.3@1504.21,1422.13 P3.2@1831.3,1422.13
NetP4_2: P4.2 Q3.3 | length 355.8
  Top Layer w10: P4.2@1835.45,1839.21 P4.2
  Top Layer w16: Q3.3 1806.24,1810 P4.2@1835.45,1839.21
NetQ1_1: Q1.1 R6.2 | length 105.3
  Top Layer w10: Q1.1 1407.6,1065.59 1455.28,1113.27 1455.28,1139.69 R6.2
NetQ2_1: Q2.1 R7.2 | length 100.3
  Top Layer w10: Q2.1 1422.6,1450.59 1425.47,1453.46 1425.47,1472.91 1475.59,1523.03 R7.2
NetQ3_1: Q3.1 R8.2 | length 109.4
  Top Layer w10: Q3.1 1417.6,1835.59 1420.47,1838.46 1420.47,1852.91 1480.59,1913.03 R8.2
NetR1_1: R1.1 U1.8 | length 117
  Top Layer w10: U1.8@929.8,179.92 U1.8 1009.41,180 1022.68,166.73 1024.65,166.73 1034.41,156.97 R1.1 R1.1@1034.92,155.51
NetR2_1: R2.1 U3.8 | length 125.7
  Top Layer w10: U3.8@929.8,459.92 U3.8 976.38,460 1029.41,406.97 R2.1 R2.1@1029.41,403.03
NetR3_2: R3.2 U6.3 | length 139.9
  Top Layer w10: R3.2@1057.09,965 1079.49,942.6 U6.3
NetR4_2: R4.2 U7.3 | length 142
  Top Layer w10: R4.2 1104.49,1332.6 U7.3
NetR5_2: R5.2 U8.3 | length 147
  Top Layer w10: R5.2 1109.49,1712.6 U8.3
NetR6_1: R6.1 U6.1 | length 373.9
  Top Layer w10: U6.1 1187.76,1142.76 1220,1175 1379.41,1175 1397.68,1156.73 1399.65,1156.73 1409.41,1146.97 R6.1
NetR7_1: R7.1 U7.1 | length 386
  Top Layer w10: U7.1 1207.76,1547.76 1230,1570 1379.41,1570 1412.68,1536.73 1414.65,1536.73 1424.41,1526.97 R7.1
NetR8_1: R8.1 U8.1 | length 363.9
  Top Layer w10: U8.1 1217.76,1912.76 1250,1945 1399.41,1945 1417.68,1926.73 1419.65,1926.73 1429.41,1916.97 R8.1
NetU1_2: U1.2 U2.3 | length 810.3
  Top Layer w10: U1.2 809.69,199.69 975,365 1175,365 1342.4,197.6 U2.3
NetU3_2: U3.2 U5.3 | length 788.4
  Top Layer w10: U3.2 861.07,479.69 1001.39,620 1270,620 1397.4,492.6 U5.3
R_PWM: FPGA.4 R5.3 | length 2237.7
  Top Layer w10: FPGA.4@156.85,388.15 145.31,399.69 70.31,399.69 44,426 44,904 188,1048 805,1048 895,1138 895,1722.2 941.42,1768.62 958.07,1785.28 R5.3
SCLK: FPGA.2 U1.6 U3.6 | length 1753.7
  Top Layer w10: FPGA.2 FPGA.2@195.04,285 ; U1.6 929.65,140.55 900.55,140.55 860,100 380.04,100 FPGA.2@195.04,285 ; U3.6 850.91,420.63 765.28,335 610.39,335 515.39,430 315.04,430 195.04,310 FPGA.2@195.04,285
X_GALVO: P1.1 U2.1 U2.4 | length 355.8
  Top Layer w10: U2.1 1484.14,272.4 1490,266.54 1490,230 1499.48,220.52 1502.51,220.52 1525.43,197.6 U2.4 1622.6,197.6 P1.1
X_MOSI: FPGA.3 U1.7 | length 895
  Top Layer w10: FPGA.3 324.96,385 291.55,351.59 291.55,213.45 386.7,118.3 818.3,118.3 860.32,160.32 U1.7@903.04,160.32
Y_GALVO: P1.3 U5.1 U5.4 | length 322.7
  Top Layer w10: U5.1 1487.6,567.4 1495,560 1495,515 1508.62,501.38 1533.46,501.38 U5.4 1546.04,488.8 1706.2,488.8 P1.3
Y_MOSI: FPGA.5 U3.7 | length 644.3
  Top Layer w10: FPGA.5 371.3,480 507.64,480 622.64,365 763.61,365 838.93,440.32 U3.7
pads on no net: FPGA.7

## Polygon pours and split planes (outlines as drawn)
GND on Top Layer "TOP_GND_PLANE" (solid, pour order 2): 0,100 ccw(c100,100) 100,0 2025,0 ccw(c2025,100) 2125,100 2125,270 2125,2050 2125,2150 ccw(c2025,2150) 2025,2250 1785,2250 275,2250 100,2250 ccw(c100,2150) 0,2150
GND on Bottom Layer "BOTTOM_GND_PLANE" (solid, pour order 1): 0,100 ccw(c100,100) 100,0 2025,0 ccw(c2025,100) 2125,100 2125,270 2125,2050 2125,2150 ccw(c2025,2150) 2025,2250 1785,2250 275,2250 100,2250 ccw(c100,2150) 0,2150

## Keep-outs
Keep-Out Layer:
  the board outline again, w1

## Silkscreen, mask and mechanical layers (free items; w line width, h text height)
Top Overlay:
  text "- +" at 1990.19,1874.48 h60 r270
  text "- +" at 579.81,1670.52 h60 r90
  text "- +" at 1990,1440 h60 r270
  text "fpga / laser / projector /  / fischerm / jaytlang / 6.111 fall 2020" at 50,1075 h60
  text "- +" at 1980.19,1044.48 h60 r270
  text "GND" at 1825,555 h60
  text "Y" at 1830,455 h60
  text "GND" at 1830,350 h60
  text "X" at 1830,245 h60
Bottom Overlay:
  drawing of 9 lines, arcs and shapes, not listed

## Text inside footprints (layer, text, board x,y; h text height)
FPGA: Top Overlay "1" at 417.48,236.57 h40 r90; Top Overlay "2" at 141.89,224.76 h40 r90